# EAGLE board IO Valve testing (EAGLE 9.2.2)
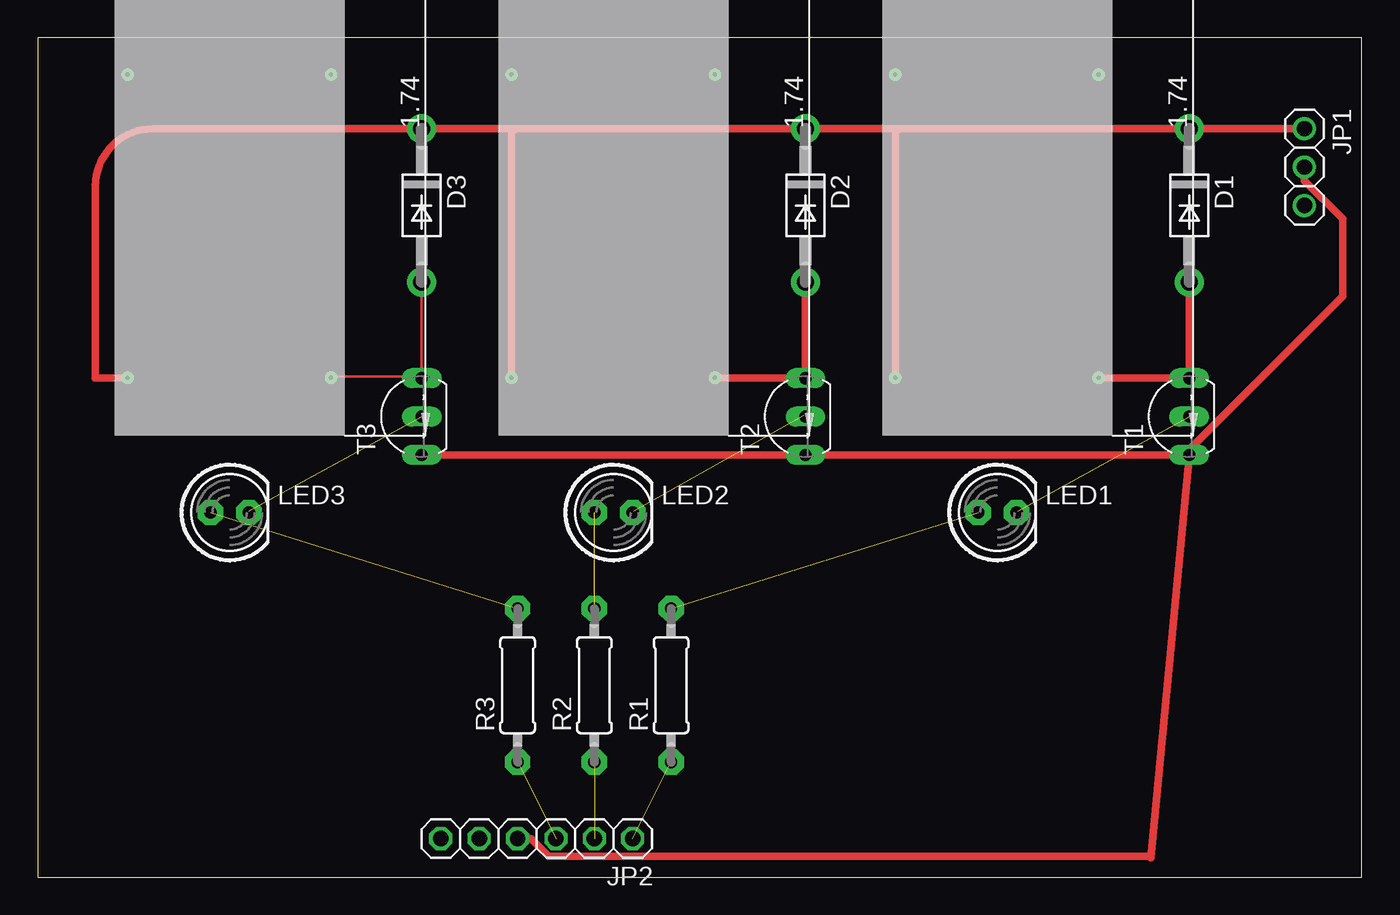
[diagram p0: board, top side]
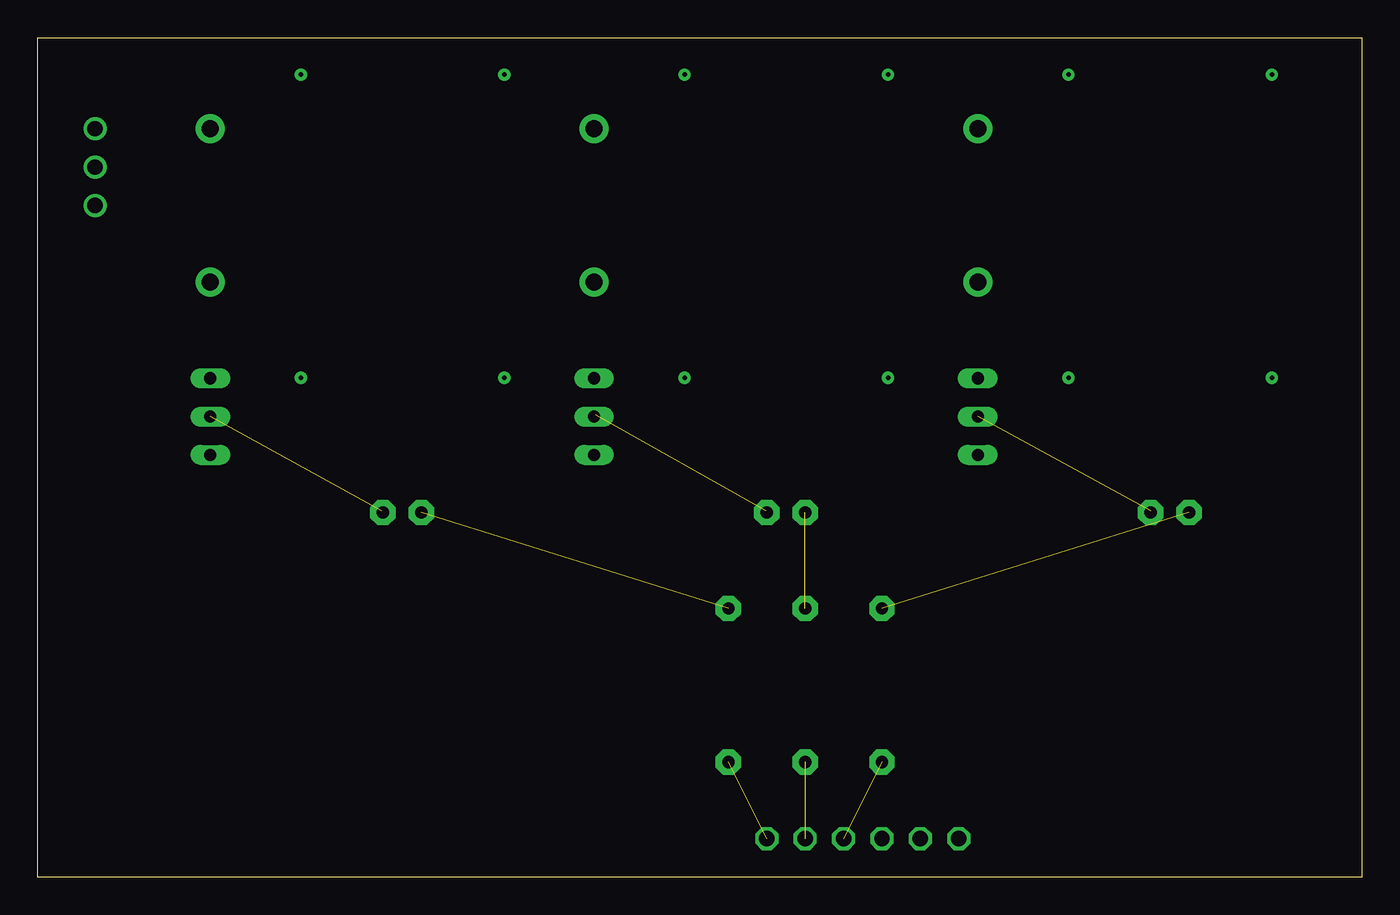
[diagram p1: board, bottom side, seen from below]

Size 87.61 x 55.55 mm. Coordinates in mm from the lower left corner, seen from the top.
Outline: 0,0 87.61,0 87.61,55.55 0,55.55 0,0
Copper layers (1*16): Top 0.035mm / dielectric 1.5mm / Bottom 0.035mm
Design rules "default": minimum track width 6mil, minimum drill 0.35mm, track to track 6mil, track to pad 6mil, pad to pad 6mil, via to via 6mil, smd to smd 6mil, copper to edge 40mil, drill to drill 6mil, minimum pad ring 10mil, minimum via ring 8mil, stop-mask expansion 4mil, vias tented up to drill 0mil, thermal gap 10mil

## Footprints (pad centres in the part's own frame; a part is rotated, then mirrored left to right if it is on the bottom)
DO41-10 = drill 1.118 pad 1.93: A 5.08,0; C -5.08,0
1X03 = drill 1.016: 1 -2.54,0; 2 0,0; 3 2.54,0
1X06 = drill 1.016 octagon: 1 -6.35,0; 2 -3.81,0; 3 -1.27,0; 4 1.27,0; 5 3.81,0; 6 6.35,0
LED5MM = drill 0.813 pad 1.676 octagon: A -1.27,0; K 1.27,0
0207/10 = drill 0.813 pad 1.676 octagon: 1 -5.08,0; 2 5.08,0
TO92-EBC-OVAL = drill 0.813 long: B 0,-1.27; C 2.54,-1.27; E -2.54,-1.27
VALVTEST2 = drill 0.3: PAD10 3.835,14.376; PAD11 3.835,0.914; PAD12 23.901,0.914; PAD13 23.901,14.376

## Placement (x,y rotation side)
D1  1N4004  [DO41-10]  76.2,44.45 270 top
D2  1N4004  [DO41-10]  50.8,44.45 270 top
D3  1N4004  [DO41-10]  25.4,44.45 270 top
JP1  [1X03]  83.82,46.99 270 top
JP2  [1X06]  33.02,2.54 180 top
LED1  [LED5MM]  63.5,24.13 0 top
LED2  [LED5MM]  38.1,24.13 0 top
LED3  [LED5MM]  12.7,24.13 0 top
R1  [0207/10]  41.91,12.7 90 top
R2  [0207/10]  36.83,12.7 90 top
R3  [0207/10]  31.75,12.7 90 top
T1  2N2222  [TO92-EBC-OVAL]  74.93,30.48 90 top
T2  2N2222  [TO92-EBC-OVAL]  49.53,30.48 90 top
T3  2N2222  [TO92-EBC-OVAL]  24.13,30.48 90 top
U$1  [VALVTEST2]  71.12,29.21 90 top
U$2  [VALVTEST2]  45.72,29.21 90 top
U$3  [VALVTEST2]  20.32,29.21 90 top

## Library data of the parts
D1-D3 JP1 JP2 LED1-LED3 R1-R3 T1-T3 = adafruit
U$1-U$3 = local eagle library

## Nets
5V: D1.C D2.C D3.C JP1.1 U$1.PAD10 U$2.PAD10 U$3.PAD10
GND: JP1.2 JP2.4 T1.E T2.E T3.E
N$1: D1.A T1.C U$1.PAD11
N$2: LED1.K T1.B
N$3: LED1.A R1.2
N$5: D2.A T2.C U$2.PAD11
N$6: LED2.K T2.B
N$7: LED2.A R2.2
N$9: D3.A T3.C U$3.PAD11
N$10: LED3.K T3.B
N$11: LED3.A R3.2
VALVEGPIO1: JP2.1 R1.1
VALVEGPIO2: JP2.2 R2.1
VALVEGPIO3: JP2.3 R3.1

## Tracks (layer width: path | path; a pad name or v marks a point on that pad's centre or on a via)
5V
  Top 0.508: 31.75,49.53 D3.C 7.62,49.53 arc90 3.81,45.72 3.81,33.02 5.92,33.02 arc90 U$3.PAD10 | 31.75,49.53 D2.C 57.15,49.53 | 31.75,49.53 arc90 31.34,49.12 U$2.PAD10 | 57.15,49.53 arc90 56.74,49.12 U$1.PAD10 | JP1.1 D1.C 57.15,49.53
GND
  Top 0.152: 50.7,27.89 T2.E
  Top 0.508: T1.E T2.E T3.E | T1.E 76.2,28.31 86.34,38.45 86.34,43.58 83.82,46.1 JP1.2 | JP2.4 32.64,2.54 33.81,1.37 73.56,1.37 73.66,1.27 T1.E
  Bottom 0.152: 50.7,27.84 T2.E | 76.15,28.04 T1.E
N$1
  Top 0.152: 76.15,33.02 T1.C 76.3,33.07 | 76.15,39.32 D1.A 76.3,39.32 | 70.21,33.12 U$1.PAD11
  Top 0.508: U$1.PAD11 arc90 70.23,33.02 T1.C D1.A
N$2  (1 unrouted)
  Top 0.152: 64.87,24.23 LED1.K
N$3  (1 unrouted)
  Top 0.152: 62.28,24.08 LED1.A 62.28,24.13
N$5
  Top 0.152: U$2.PAD11 44.81,33.38 | 50.85,33.02 T2.C 50.85,33.07 | 50.85,39.32 D2.A
  Top 0.508: U$2.PAD11 arc90 44.83,33.02 T2.C D2.A
N$6  (1 unrouted)
  Top 0.152: 50.7,30.58 T2.B | 39.42,24.23 LED2.K
N$7  (1 unrouted)
N$9
  Top 0.152: U$3.PAD11 19.46,33.12 25.4,33.12 D3.A T3.C
N$10  (1 unrouted)
  Top 0.152: 25.4,30.58 T3.B | 13.97,24.23 LED3.K
N$11  (1 unrouted)
  Top 0.152: 11.38,24.08 LED3.A 11.38,24.13
VALVEGPIO1  (1 unrouted)
VALVEGPIO2  (1 unrouted)
VALVEGPIO3  (1 unrouted)